# EAGLE board DUT-28bit-preCounter (EAGLE 5.07)
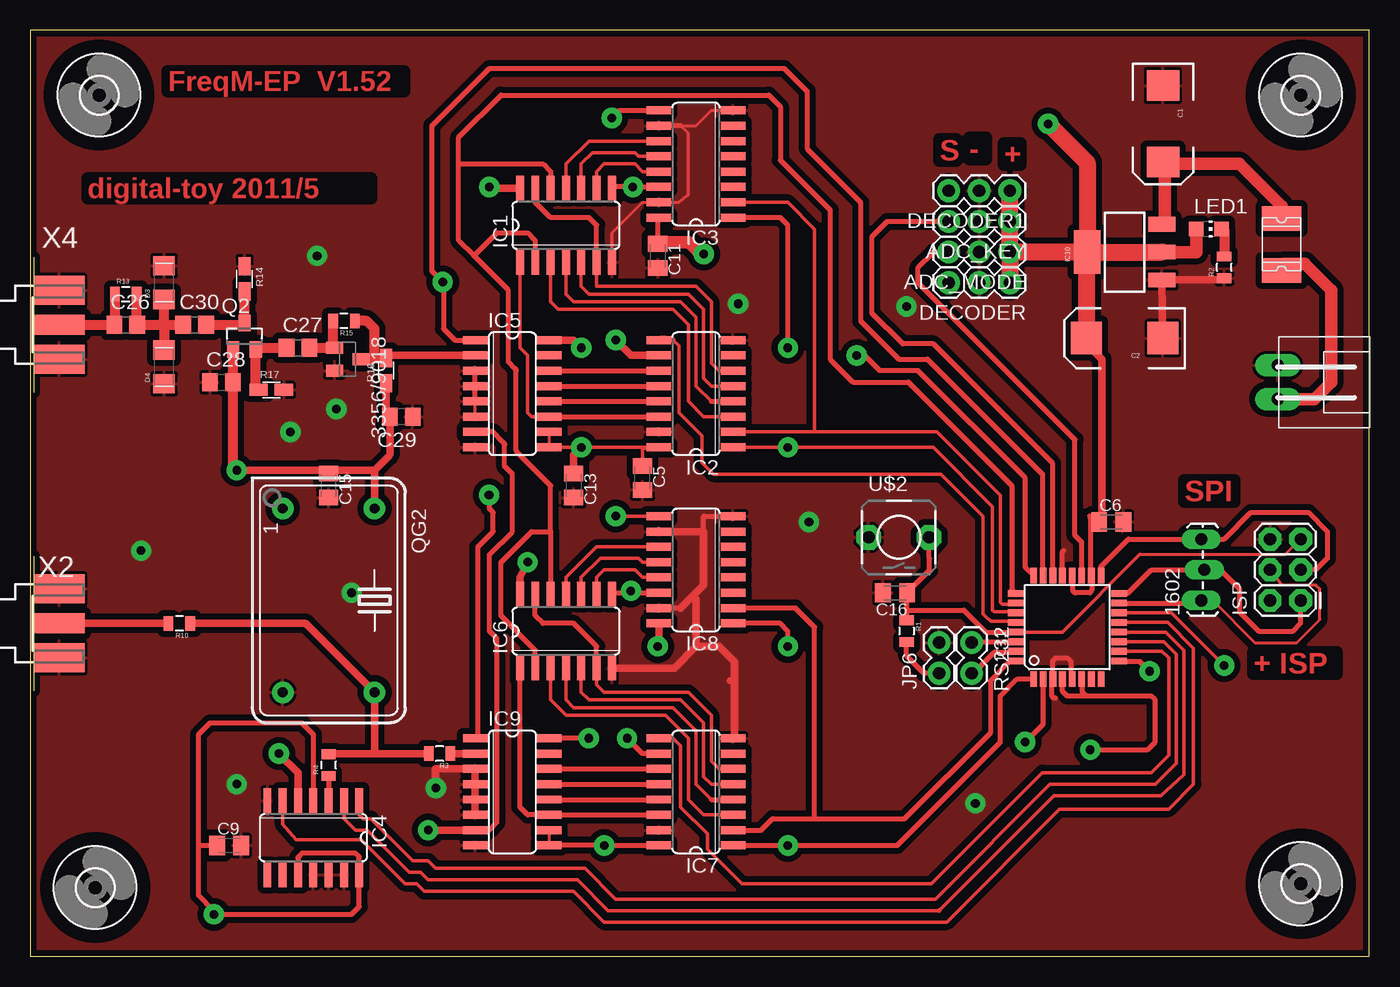
[diagram p0: board, top side]
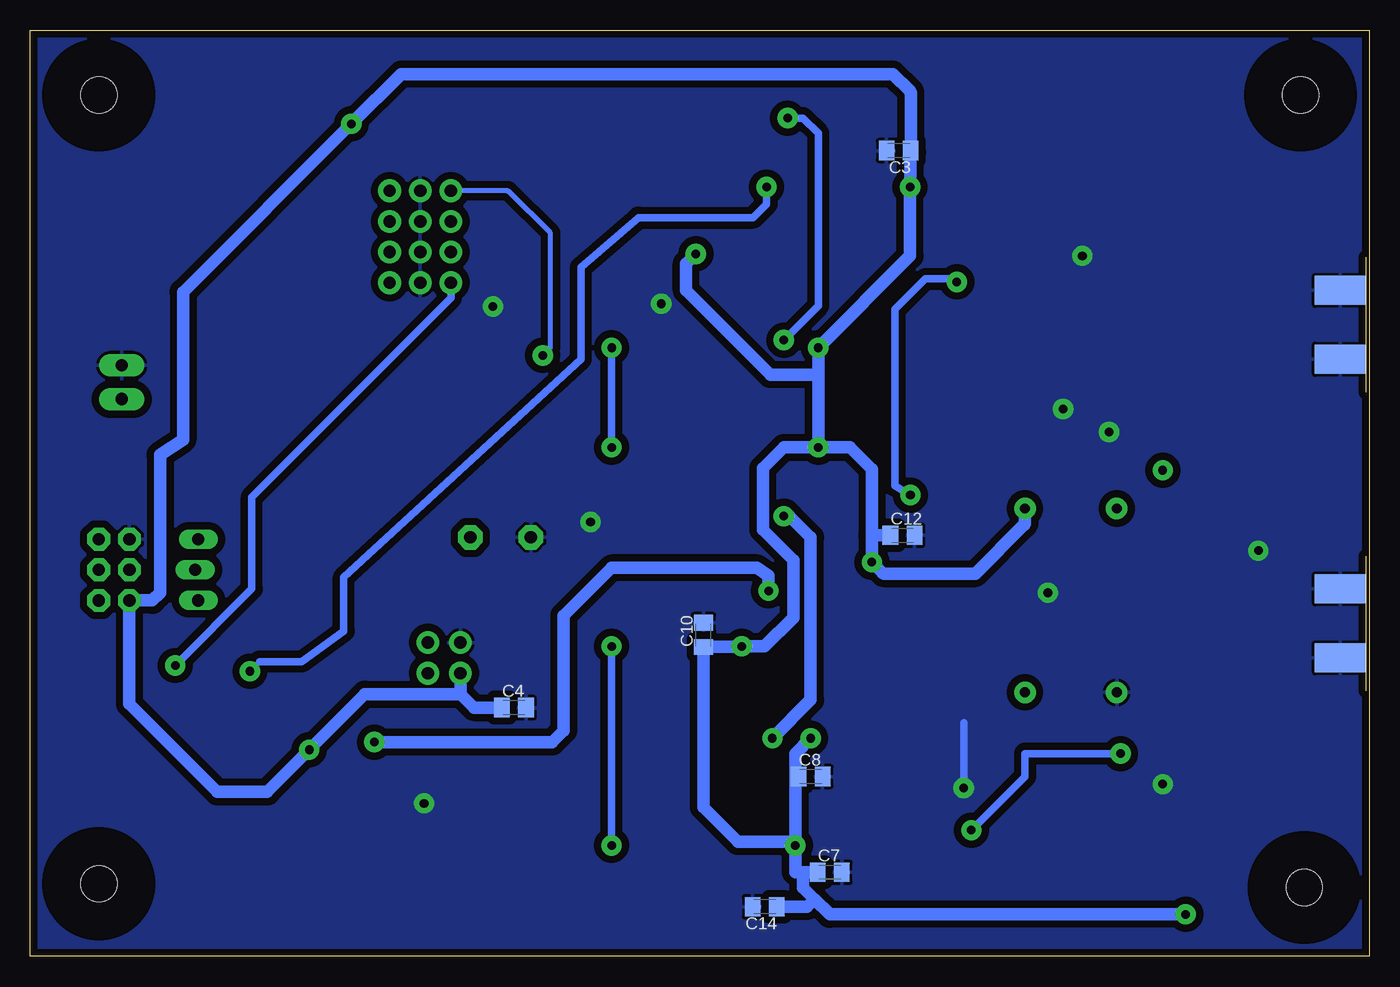
[diagram p1: board, bottom side, seen from below]

Size 111.11 x 76.82 mm. Coordinates in mm from the lower left corner, seen from the top.
Outline: 0,0 111.11,0 111.11,76.82 0,76.82 0,0
Copper layers (1*16): Top 0.035mm / dielectric 1.5mm / Bottom 0.035mm
Design rules "SparkFun": minimum track width 8mil, minimum drill 20mil, track to track 8mil, track to pad 8mil, pad to pad 8mil, via to via 8mil, smd to smd 8mil, copper to edge 10mil, drill to drill 8mil, minimum pad ring 12mil, minimum via ring 10mil, stop-mask expansion 4mil, vias tented up to drill 25mil, thermal gap 10mil

## Footprints (pad centres in the part's own frame; a part is rotated, then mirrored left to right if it is on the bottom)
1X03_LOCK_LONGPADS = drill 1.016 long: 1 0,0; 2 2.54,-0.254; 3 5.08,0
SOT23-BEC = smd 1 x 1.4: B -0.95,-1.1; C 0,1.1; E 0.95,-1.1
1X03 = drill 1.016 pad 1.88 round: 1 0,0; 2 2.54,0; 3 5.08,0
EIA7343 = smd 2.55 x 2.7: A 3.17,0; C -3.17,0
C0805K = smd 1.3 x 1.6: 1 -1,0; 2 1,0
C0805 = smd 1.3 x 1.5: 1 -0.95,0; 2 0.95,0
1206-DIODE = smd 1.6 x 1.8: A -1.4,0; K 1.4,0
3,0 = hole 3: 0,0
SO14 = smd 0.66 x 2.032: 1 -3.81,-3.073; 2 -2.54,-3.073; 3 -1.27,-3.073; 4 0,-3.073; 5 1.27,-3.073; 6 2.54,-3.073; 7 3.81,-3.073; 8 3.81,3.073; 9 2.54,3.073; 10 1.27,3.073; 11 0,3.073; 12 -1.27,3.073; 13 -2.54,3.073; 14 -3.81,3.073
SO16 = smd 0.66 x 2.032: 1 -4.445,-3.073; 2 -3.175,-3.073; 3 -1.905,-3.073; 4 -0.635,-3.073; 5 0.635,-3.073; 6 1.905,-3.073; 7 3.175,-3.073; 8 4.445,-3.073; 9 4.445,3.073; 10 3.175,3.073; 11 1.905,3.073; 12 0.635,3.073; 13 -0.635,3.073; 14 -1.905,3.073; 15 -3.175,3.073; 16 -4.445,3.073
SOT223 = smd 1.219 x 2.235: 1 -2.311,-3.099; 2 0,-3.099; 3 2.311,-3.099 | smd 3.6 x 2.2: 4 0,3.099
TQFP32-08 = smd 1.27 x 0.559: 1 -4.293,2.8; 2 -4.293,2; 3 -4.293,1.2; 4 -4.293,0.4; 5 -4.293,-0.4; 6 -4.293,-1.2; 7 -4.293,-2; 8 -4.293,-2.8; 17 4.293,-2.8; 18 4.293,-2; 19 4.293,-1.2; 20 4.293,-0.4; 21 4.293,0.4; 22 4.293,1.2; 23 4.293,2; 24 4.293,2.8 | smd 0.559 x 1.27: 9 -2.8,-4.293; 10 -2,-4.293; 11 -1.2,-4.293; 12 -0.4,-4.293; 13 0.4,-4.293; 14 1.2,-4.293; 15 2,-4.293; 16 2.8,-4.293; 25 2.8,4.293; 26 2,4.293; 27 1.2,4.293; 28 0.4,4.293; 29 -0.4,4.293; 30 -1.2,4.293; 31 -2,4.293; 32 -2.8,4.293
2X3 = drill 1.016 pad 1.88 octagon: 1 0,0; 2 0,2.54; 3 2.54,0; 4 2.54,2.54; 5 5.08,0; 6 5.08,2.54
1X02 = drill 1.016 pad 1.88 round: 1 0,0; 2 2.54,0
XH-1X2-LONG-LOCK = drill 1.016 pad 1.88 long: 1 1.397,0; 2 -1.397,0
CHIP-LED0805 = smd 1.2 x 1.2: A 0,-1.05; C 0,1.05
1812L = smd 2.03 x 3.3: P$1 -2.16,0; P$2 2.16,0
SOT23 = smd 1 x 1.4: 1 -0.95,-1.1; 2 0.95,-1.1; 3 0,1.1
DIL14S = drill 0.813 pad 1.778 round: 1 -7.62,-3.81; 7 7.62,-3.81; 8 7.62,3.81; 14 -7.62,3.81
0805 = smd 0.8 x 1.2: 1 -0.9,0; 2 0.9,0
R0805W = smd 1.5 x 1: 1 -1.052,0; 2 1.052,0
ALPS-SKHV = drill 1.016 pad 2.032 octagon: 2 -2.51,0; 3 2.51,0
SMA-KE = smd 4.191 x 1.651: 1 2.115,0 | smd 4.191 x 2.413: G@1 2.115,2.86; G@2 2.115,-2.86 | smd 4.191 x 2.413 bottom: G@3 2.115,2.86; G@4 2.115,-2.86

## Placement (x,y rotation side)
1602  [1X03_LOCK_LONGPADS]  97.16,29.53 90 top
3356/9018  [SOT23-BEC]  26.35,49.53 270 top
ADC_KEY  [1X03]  81.28,60.96 180 top
ADC_MODE  [1X03]  81.28,58.42 180 top
C1  10uf  [EIA7343]  93.98,69.06 270 top
C2  10uf  [EIA7343]  90.81,51.28 180 top
C3  104  [C0805K]  39.05,66.83 180 bottom
C4  104  [C0805K]  70.96,20.64 0 bottom
C5  104  [C0805K]  50.8,39.69 270 top
C6  104  [C0805K]  89.69,36.04 0 top
C7  104  [C0805K]  44.77,6.99 0 bottom
C8  104  [C0805K]  46.35,14.92 0 bottom
C9  [C0805K]  16.51,9.21 0 top
C10  [C0805K]  55.24,26.67 90 bottom
C11  104  [C0805K]  52.07,58.1 270 top
C12  104  [C0805K]  38.73,34.92 0 bottom
C13  104  [C0805K]  45.09,39.05 270 top
C14  104  [C0805K]  50.16,4.13 180 bottom
C15  104  [C0805K]  24.77,39.05 270 top
C16  100n  [C0805K]  71.75,30.16 180 top
C26  331  [C0805]  7.94,52.39 0 top
C27  103  [C0805]  22.23,50.48 0 top
C28  103  [C0805]  15.88,47.62 0 top
C29  103  [C0805]  30.8,44.77 180 top
C30  103  [C0805]  13.65,52.39 0 top
D3  4148  [1206-DIODE]  11.11,55.88 90 top
D4  4148  [1206-DIODE]  11.11,48.9 90 top
DECODER  [1X03]  81.28,55.88 180 top
DECODER1  [1X03]  81.28,63.5 180 top
H1  MOUNT-HOLE3.0  [3,0]  5.71,71.44 0 top
H2  MOUNT-HOLE3.0  [3,0]  105.41,6.03 0 top
H3  MOUNT-HOLE3.0  [3,0]  105.41,71.44 0 top
H4  MOUNT-HOLE3.0  [3,0]  5.4,5.71 0 top
IC1  74HC393D  [SO14]  44.45,60.64 0 top
IC2  74HC165D  [SO16]  55.24,46.67 90 top
IC3  74HC165D  [SO16]  55.24,65.72 90 top
IC4  74HC74D  [SO14]  23.5,9.84 180 top
IC5  4161D  [SO16]  40.01,46.67 270 top
IC6  74HC393D  [SO14]  44.45,26.99 0 top
IC7  74HC165D  [SO16]  55.24,13.65 90 top
IC8  74HC165D  [SO16]  55.24,32.07 90 top
IC9  4161D  [SO16]  40.01,13.65 270 top
IC10  1117-5V  [SOT223]  90.81,58.42 90 top
IC11  MEGA8-AI  [TQFP32-08]  86.04,27.3 90 top
ISP  AVR_SPI_PRG_6PTH  [2X3]  105.41,29.53 90 top
JP6  [1X02]  75.41,23.5 90 top
JP7  EXT  [XH-1X2-LONG-LOCK]  103.5,47.62 270 top
LED1  RED  [CHIP-LED0805]  97.79,60.33 270 top
PTC  500mA  [1812L]  103.82,59.05 90 top
Q2  SST5485  [SOT23]  17.78,51.44 0 top
QG2  1M/50M  [DIL14S]  24.77,29.53 270 top
R1  10k  [0805]  72.71,26.99 270 top
R2  400R  [0805]  99.06,57.15 90 top
R3  33  [0805]  33.97,16.83 180 top
R4  33  [0805]  24.77,15.88 90 top
R10  33  [0805]  12.38,27.62 180 top
R13  100R  [0805]  7.94,54.93 0 top
R14  1M  [R0805W]  17.78,56.2 270 top
R15  9.1k  [0805]  26.04,52.7 180 top
R16  560R  [R0805W]  29.53,48.58 90 top
R17  1k  [R0805W]  20,46.99 0 top
RS232  [1X02]  78.11,26.04 270 top
U$2  TACT_SWITCH-2-PTH  [ALPS-SKHV]  72.07,34.77 0 top
X2  SMA--KE  [SMA-KE]  0.32,27.62 0 top
X4  SMA--KE  [SMA-KE]  0.32,52.39 0 top

## Library data of the parts
1602 ADC_KEY ADC_MODE DECODER DECODER1 IC10 ISP = SparkFun
3356/9018 C1-C16 C26-C30 D3 D4 JP6 JP7 PTC QG2 R1-R4 R10 R13-R17 RS232 U$2 = digital-toy
H1-H4 = holes
IC1-IC4 IC6-IC8 = 74xx-eu
IC5 IC9 = 40xx
IC11 = atmel
LED1 = led
Q2 = transistor-fet
X2 X4 = dtoy-RF

## Nets
ADC_KEY: ADC_KEY.3 IC11.22
ADC_MODE: ADC_MODE.3 IC11.19
BUTTON: DECODER1.3 IC11.24
CLK-165: IC7.2 IC8.2 IC11.32
CLK-165-DUT: IC2.2 IC3.2 IC11.26
CLK-REF: QG2.8 R3.2 R4.2 R10.1
CLR-161: IC5.1 IC9.1 IC11.23
CLR-393: IC1.2 IC1.12 IC6.2 IC6.12 IC11.25
CLR-FF: IC4.1 IC11.11
D-FF: IC4.2 IC11.12
DECODER: DECODER.3 IC11.14
GATE-161: IC4.5 IC5.7 IC9.7
GND: 3356/9018.E ADC_KEY.2 ADC_MODE.2 C1.C C2.C C3.2 C4.2 C5.2 C6.2 C7.2 C8.2 C9.2 C10.2 C11.2 C12.2 C13.2 C14.2 C15.2 C16.2 C28.1 C29.1 D3.K D4.A DECODER1.2 DECODER.2 IC1.7 IC2.8 IC2.15 IC3.8 IC3.10 IC3.15 IC4.7 IC4.11 IC4.12 IC4.13 IC5.3 IC5.4 IC5.5 IC5.6 IC5.8 IC6.7 IC7.8 IC7.15 IC8.8 IC8.10 IC8.15 IC9.3 IC9.4 IC9.5 IC9.6 IC9.8 IC10.1 IC11.3 IC11.5 IC11.21 ISP.6 JP6.2 JP7.2 QG2.7 R2.1 R14.1 R17.2 U$2.2 X2.G@1 X2.G@2 X2.G@3 X2.G@4 X4.G@1 X4.G@2 X4.G@3 X4.G@4
MISO: 1602.2 IC11.16 ISP.1
MOSI: 1602.1 IC11.15 ISP.4
N$1: IC2.11 IC5.14
N$2: IC2.12 IC5.13
N$3: IC2.13 IC5.12
N$4: JP7.1 PTC.P$1
N$5: IC1.3 IC2.3
N$6: IC1.4 IC2.4
N$7: IC1.5 IC2.5
N$8: IC1.6 IC1.13 IC2.6
N$9: IC1.1 IC2.14 IC5.11
N$10: IC1.11 IC3.11
N$11: IC1.10 IC3.12
N$12: IC1.9 IC3.13
N$13: IC11.30 RS232.1
N$14: C1.A IC10.3 PTC.P$2
N$15: IC2.10 IC3.9
N$16: IC7.11 IC9.14
N$17: IC7.12 IC9.13
N$18: IC7.13 IC9.12
N$19: R10.2 X2.1
N$20: IC6.3 IC7.3
N$21: IC6.4 IC7.4
N$22: IC6.5 IC7.5
N$23: IC6.6 IC6.13 IC7.6
N$24: IC6.11 IC8.11
N$25: IC6.10 IC8.12
N$26: IC6.9 IC8.13
N$27: IC11.31 RS232.2
N$28: IC6.1 IC7.14 IC9.11
N$29: IC4.3 R4.1
N$30: IC7.10 IC8.9
N$31: IC9.2 R3.1
N$32: LED1.C R2.2
N$41: C26.1 R13.1 X4.1
N$42: C26.2 C30.1 D3.A D4.K R13.2
N$43: C27.1 Q2.2 R17.1
N$44: 3356/9018.B C27.2 R15.2
N$45: 3356/9018.C IC5.2 R15.1 R16.2
N$46: C30.2 Q2.3 R14.2
NQ-FF: IC4.6 IC11.13
PD4/T0: IC6.8 IC8.14 IC11.2
PD5/T1: IC1.8 IC3.14 IC11.9
QH-165: IC7.9 IC11.10
QH-165-DUT: IC2.9 IC11.28
RESET: C16.1 IC11.29 ISP.5 R1.1 U$2.3
SCK: 1602.3 IC11.17 ISP.3
SHLD-165: IC7.1 IC8.1 IC11.1
SHLD-165-DUT: IC2.1 IC3.1 IC11.27
VCC: ADC_KEY.1 ADC_MODE.1 C2.A C3.1 C4.1 C5.1 C6.1 C7.1 C8.1 C9.1 C10.1 C11.1 C12.1 C13.1 C14.1 C15.1 C28.2 C29.2 DECODER1.1 DECODER.1 IC1.14 IC2.16 IC3.16 IC4.4 IC4.10 IC4.14 IC5.9 IC5.10 IC5.16 IC6.14 IC7.16 IC8.16 IC9.9 IC9.10 IC9.16 IC10.2 IC10.4 IC11.4 IC11.6 IC11.18 IC11.20 ISP.2 JP6.1 LED1.A Q2.1 QG2.14 R1.2 R16.1

## Tracks (layer width: path | path; a pad name or v marks a point on that pad's centre or on a via)
ADC_KEY
  Top 0.406: IC11.22 84.84,40.89 74.93,50.8 72.39,50.8 69.85,53.34 69.85,59.69 71.12,60.96 ADC_KEY.3
ADC_MODE
  Top 0.406: IC11.19 87.24,34.36 86.68,34.92 86.68,42.86 73.66,55.88 73.66,57.15 74.93,58.42 ADC_MODE.3
BUTTON  (via drill 0.71 pad 1.68)
  Top 0.406: IC11.24 82.62,32.22 arc-45 82.55,32.4 82.55,39.69 73.66,48.58 70.48,48.58 69.29,49.77 arc45 69.11,49.85 v68.58,49.85
  Bottom 0.406: DECODER1.3 71.54,63.5 arc45 71.36,63.43 67.94,60.01 67.94,50.59 arc45 68.02,50.41 v68.58,49.85
CLK-165
  Top 0.406: IC8.2 63.5,28.89 65.09,27.3 65.09,11.43 | IC7.2 60.64,10.48 61.59,11.43 65.09,11.43 | IC11.32 81.34,24.5 79.69,22.86 79.69,18.57 72.55,11.43 65.09,11.43
CLK-165-DUT
  Top 0.254: 81.66,29.21 IC11.26
  Top 0.305: IC3.2 62.87,62.55 65.09,60.33 65.09,43.5 | 81.66,29.21 80.64,29.21 80.49,29.37 80.49,38.26 | IC2.2 65.09,43.5 | 80.49,38.26 | 80.49,38.26 75.25,43.5 65.09,43.5
CLK-REF
  Top 0.61: 28.57,16.83 24.89,16.83 arc45 R4.2 | 28.57,16.83 R3.2 | 28.57,16.83 QG2.8 22.93,27.55 arc45 22.75,27.62 R10.1
CLR-161  (via drill 0.71 pad 1.68)
  Top 0.254: IC9.1 36.93,18.2 | 38.1,38.24 v38.08,38.27
  Top 0.406: 36.93,18.2 37.15,18.1 37.15,33.97 38.42,35.24 38.42,36.83 38.1,37.15 38.1,38.24 | IC5.1 35.24,51.12 34.29,52.07 34.29,55.69 v34.23,55.94 33.34,56.83 33.34,68.9 38.1,73.66 62.55,73.66 64.45,71.75 64.45,66.99 68.9,62.55 68.9,52.7 72.07,49.53 74.45,49.53 83.98,40.01 83.98,31.66 IC11.23
  Bottom 0.406: 34.92,56.2 34.8,56.2
  Bottom 0.61: 34.92,56.2 36.83,56.2 39.37,53.66 39.37,39.05 v38.08,38.27 | 34.8,56.2 v34.23,55.94
CLR-393
  Top 0.406: 43.18,35.24 IC6.12 | 43.18,35.24 43.18,39.05 40.4,41.84 arc-45 40.32,42.02 40.32,48.58 arc45 40.25,48.76 39.69,49.32 39.69,55.24 36.83,58.1 | IC6.2 41.91,25.4 39.05,28.26 39.05,32.7 41.59,35.24 43.18,35.24 | 36.83,58.1 35.56,59.37 35.56,65.72 | 35.56,65.72 35.56,67.94 39.05,71.44 61.28,71.44 62.23,70.48 62.23,66.04 66.36,61.91 66.36,49.53 68.26,47.62 72.87,47.62 81.44,39.05 81.44,30.42 IC11.25 | IC1.12 43.18,65.09 42.55,65.72 35.56,65.72 | IC1.2 41.91,59.37 41.27,60.01 38.73,60.01 36.83,58.1
CLR-FF
  Top 0.305: IC11.11 94.07,26.11 95.09,25.08 95.09,16.03 93.34,14.29 84.61,14.29 75.09,4.76 48.58,4.76 46.04,7.3 33.66,7.3 33.02,7.94 31.75,7.94 28.26,11.43 27.62,11.43 27.3,11.75 IC4.1
D-FF
  Top 0.305: IC11.12 94.22,26.91 95.73,25.4 95.73,15.08 93.82,13.34 84.93,13.34 75.41,3.81 47.94,3.81 45.4,6.35 33.02,6.35 32.38,6.99 31.43,6.99 27.94,10.48 26.99,10.48 26.04,11.43 IC4.2
  Top 0.406: 75.41,3.81
DECODER  (via drill 0.71 pad 1.68)
  Top 0.305: IC11.14 94.69,28.5 v99.06,24.13
  Bottom 0.61: v99.06,24.13 92.71,30.48 92.71,38.1 76.2,54.61 DECODER.3
GATE-161  (via drill 0.71 pad 1.68)
  Top 0.406: IC9.7 38.1,10.48 38.73,11.11 38.73,26.35 38.1,26.99 38.1,33.34 40.01,35.24 40.01,40.01 39.37,40.64 39.37,42.44 arc45 39.3,42.62 38.42,43.5 IC5.7
  Top 0.61: v33.02,10.48 IC9.7 | IC4.5 22.23,15.24 v20.64,16.83
  Bottom 0.61: v33.02,10.48 28.57,14.92 28.57,16.83 v20.64,16.83
GND  (via drill 0.71 pad 1.68)
  Top 0.254: IC5.6 IC5.5 | IC1.7 48.26,60.01 50.8,62.55 IC3.15 53.82,62.55 54.61,63.18 54.61,68.26 53.98,68.9 | 93.9,55.98 IC10.1 | IC3.10 55.24,68.9 56.52,70.17 IC3.8
  Top 0.406: IC5.5 IC5.4 IC5.3 | 55.88,35.24 55.88,36.51 IC8.8 | 53.98,28.89 IC8.15 | 53.98,68.9 IC3.10 | 85.09,21.43 84.93,21.43 84.77,21.59 84.77,22.94 IC11.3 84.84,24.52 85.09,24.77 86.04,24.77 86.36,24.45 86.36,23.09 IC11.5 | IC11.21 85.64,33.57 85.72,33.66
  Top 0.61: IC8.10 55.88,35.24 55.88,30.8 54.93,29.84 | IC6.7 53.44,23.91 55.24,25.72 | IC7.8 58.42,18.1 58.42,22.86 | 58.42,22.86 58.42,24.45 57.15,25.72 55.24,25.72 | IC9.6 IC9.5 IC9.4 IC9.3 33.66,15.56 v33.66,13.97 | C2.C 93.9,55.98 | IC10.1 99.06,56.11 R2.1 | 58.42,22.86 58.1,22.86 | 54.93,29.84 53.98,28.89 | 55.24,25.72 55.24,29.53 arc90 54.93,29.84
  Bottom 0.61: v33.66,13.97 33.66,19.37
  other vias: 58.74,54.13 64.61,36.04 78.42,12.7 25.4,45.4 72.71,53.91 17.14,14.29 9.21,33.66 21.59,43.5 23.81,58.1 26.67,30.16
  pour Top (isolate 0.508): -3.17,83.5 114.3,80.33 118.9,78.42 127.79,15.88 116.2,-7.94 16.51,-7.94 -16.83,-4.76 -16.83,67.63
  pour Bottom (isolate 0.61): -1.27,82.23 113.67,84.14 147.32,58.1 144.46,-7.46 114.94,-4.13 26.04,-3.49 -10.79,-2.86 -10.79,72.71
MISO
  Top 0.406: IC11.16 91.06,30.11 93.03,32.07 1602.2 98.74,32.07 100.33,30.48 100.33,28.57 101.92,26.99 104.78,26.99 105.41,27.62 ISP.1
MOSI
  Top 0.254: 1602.1 98.11,29.53 101.6,26.04 105.09,26.04 107,27.94 107,30.48 106.68,30.8 103.82,30.8 ISP.4
  Top 0.406: IC11.15 96.93,29.3 1602.1
N$1
  Top 0.406: IC5.14 IC2.11
N$2
  Top 0.406: IC5.13 IC2.12
N$3
  Top 0.406: IC5.12 IC2.13
N$4
  Top 0.406: 104.01,57.47 PTC.P$1
  Top 1.016: JP7.1 106.55,46.23 107.95,47.62 107.95,55.24 105.73,57.47 104.01,57.47
N$5
  Top 0.305: IC2.3 55.88,44.77 54.61,46.04 54.61,52.39 53.34,53.66 43.81,53.66 43.18,54.29 IC1.3
N$6
  Top 0.305: IC1.4 44.45,54.93 45.09,54.29 53.98,54.29 55.24,53.02 55.24,47.31 56.52,46.04
  Top 0.406: 56.52,46.04 IC2.4
N$7
  Top 0.305: IC2.5 56.52,47.31 55.88,47.94 55.88,53.66 54.61,54.93 46.35,54.93 45.72,55.56 IC1.5
N$8
  Top 0.305: IC1.6 46.99,55.56 55.24,55.56 56.52,54.29 56.52,49.21 57.15,48.58 IC2.6
  Top 0.406: IC1.13 41.91,62.55 43.18,61.28 46.35,61.28 46.99,60.64 IC1.6
N$9
  Top 0.305: IC1.1 40.64,50.48 41.27,49.85 41.27,45.09 41.59,44.77 IC5.11
  Top 0.406: IC5.11 IC2.14
N$10
  Top 0.305: IC1.11 44.45,65.72 46.35,67.63 IC3.11
N$11
  Top 0.305: IC1.10 45.72,65.72 46.67,66.67 50.16,66.67 50.48,66.36 IC3.12
N$12
  Top 0.305: IC1.9 46.99,65.09 47.62,65.72 50.16,65.72 50.8,65.09 IC3.13
N$13
  Top 0.406: IC11.30 78.17,26.11 RS232.1
N$14
  Top 0.406: 94.14,65.72 C1.A | IC10.3 94.14,60.97
  Top 1.016: PTC.P$2 103.82,62.23 100.33,65.72 94.14,65.72 94.14,60.97
N$15  (via drill 0.71 pad 1.68)
  Top 0.406: IC3.9 48.9,70.17 v48.26,69.53
  Top 0.61: IC2.10 49.85,49.85 v48.58,51.12
  Bottom 0.61: v48.26,69.53 46.99,69.53 45.72,68.26 45.72,53.98 v48.58,51.12
N$16
  Top 0.406: IC9.14 IC7.11
N$17
  Top 0.406: IC9.13 IC7.12
N$18
  Top 0.406: IC9.12 IC7.13
N$19
  Top 0.61: X2.1 R10.2
N$20
  Top 0.305: IC6.3 43.18,21.27 44.45,20 52.7,20 54.61,18.1 54.61,13.02 55.88,11.75 IC7.3
N$21
  Top 0.305: 56.52,13.02 55.24,14.29 55.24,18.73 53.34,20.64 45.09,20.64 44.45,21.27 IC6.4
  Top 0.406: 56.52,13.02 IC7.4
N$22
  Top 0.305: IC6.5 45.72,21.91 46.35,21.27 53.98,21.27 55.88,19.37 55.88,14.92 56.52,14.29 IC7.5
N$23
  Top 0.305: IC6.6 46.99,22.54 47.62,21.91 54.61,21.91 56.52,20 56.52,16.19 57.15,15.56 IC7.6
  Top 0.406: IC6.13 41.91,28.26 42.55,27.62 45.09,27.62 46.99,25.72 IC6.6
N$24
  Top 0.305: IC6.11 44.45,31.43 46.99,33.97 IC8.11
N$25
  Top 0.305: IC6.10 45.72,31.43 47.31,33.02 50.48,33.02 50.8,32.7 IC8.12
N$26
  Top 0.305: IC6.9 46.99,31.43 47.62,32.07 50.16,32.07 50.8,31.43 IC8.13
N$27
  Top 0.406: RS232.2 78.26,23.5 80.01,25.24 81.69,25.24 IC11.31
N$28
  Top 0.406: IC7.14 IC9.11 41.27,11.75 40.64,12.38 IC6.1
N$29
  Top 0.406: R4.1 IC4.3
N$30  (via drill 0.71 pad 1.68)
  Top 0.305: v48.58,36.51 IC8.9
  Top 0.406: IC7.10 50.8,16.83 v49.53,18.1
  Bottom 1.016: v49.53,18.1 46.35,21.27 46.35,34.77 48.1,36.51 v48.58,36.51
N$31
  Top 0.61: R3.1 IC9.2
N$32
  Top 0.254: LED1.C 99.06,60.33
  Top 0.813: 99.06,60.33 R2.2
N$41
  Top 0.813: X4.1 C26.1 arc45 7.04,52.51 R13.1
N$42
  Top 0.813: C26.2 9.42,52.39 | C26.2 10.79,52.39 | 10.79,52.39 11.11,52.39 | 11.11,52.39 C30.1 | 11.11,52.39 D4.K | D3.A 11.11,52.81 arc-45 11.04,52.63 10.79,52.39 | R13.2 8.84,52.51 arc45 C26.2
N$43
  Top 0.813: R17.1 18.8,47.14 arc-45 18.73,47.31 Q2.2 18.8,50.41 arc-45 18.98,50.48 C27.1
N$44
  Top 0.813: C27.2 arc45 C27.2 3356/9018.B 25.21,50.52 arc-45 25.14,50.7 R15.2
N$45
  Top 0.305: 29.85,49.85 arc45 29.67,49.77 R16.2
  Top 0.61: 29.85,49.85 IC5.2
  Top 0.813: 3356/9018.C 27.48,49.56 arc-45 27.66,49.63 28.57,49.63 | 28.57,49.63 R16.2 | R15.1 27.84,52.7 arc-45 28.01,52.63 28.57,52.07 28.57,49.63
N$46
  Top 0.813: C30.2 17.53,52.39 arc45 17.71,52.46 Q2.3 R14.2
NQ-FF
  Top 0.305: IC4.6 20.95,10.95 22.07,9.68 27.46,9.68 31.11,6.03 32.07,6.03 32.7,5.4 45.09,5.4 47.62,2.86 76.04,2.86 85.41,12.22 94.46,12.22 96.52,14.29 96.52,25.56 94.37,27.7 IC11.13
PD4/T0  (via drill 0.71 pad 1.68)
  Top 0.254: IC6.8 48.36,30.16
  Top 0.406: 48.36,30.16 50.01,30.16 | 50.01,30.16 IC8.14 | 50.01,30.16 v49.85,30.32 | v82.55,17.78 84.04,19.27 IC11.2
  Bottom 1.016: v49.85,30.32 49.85,31.59 50.8,32.23 62.87,32.23 66.83,28.26 66.83,18.73 67.79,17.78 v82.55,17.78
PD5/T1  (via drill 0.71 pad 1.68)
  Top 0.254: 48.36,63.82 IC1.8
  Top 0.406: IC3.14 v50.01,63.82 48.36,63.82 | IC11.9 90.39,24.45 92.08,24.45 92.39,24.13 v92.87,23.65
  Bottom 0.406: 92.08,24.45 92.39,24.13
  Bottom 0.61: v50.01,63.82 50.01,62.39 51.12,61.28 60.64,61.28 65.41,57.15 65.41,49.53 85.09,31.43 85.09,26.99 88.58,24.45 92.08,24.45 | 92.39,24.13 v92.87,23.65
QH-165
  Top 0.305: IC7.9 53.34,18.1 53.98,17.46 53.98,12.38 56.2,10.16 56.2,8.89 59.05,6.03 74.77,6.03 83.98,15.24 93.03,15.24 94.46,16.67 94.46,24.77 93.89,25.3 IC11.10
QH-165-DUT
  Top 0.254: 81.67,27.78 IC11.28 | 79.3,28.18 79.22,28.26
  Top 0.305: 81.67,27.78 79.69,27.78 79.3,28.18 79.06,28.42 79.06,36.51 75.56,40.01 56.67,40.01 55.72,40.96 55.72,43.18 53.82,45.09 53.82,50.64 53.34,51.12
  Top 0.406: 53.34,51.12 52.86,51.12 52.7,51.28 52.33,51.28 IC2.9
RESET
  Top 0.254: 92.08,33.34 104.14,33.34 ISP.5
  Top 0.305: IC11.29 85.64,26.91 92.08,33.34
  Top 0.406: R1.1 72.75,27.93 72.75,28.73 | 72.75,28.73 C16.1 74.61,32.02 74.61,33.02 74.58,33.05 U$2.3 | IC11.29 79.3,26.91 77.47,28.73 72.75,28.73
SCK
  Top 0.406: IC11.17 88.84,32.33 91.12,34.61 1602.3 99.06,34.61 101.28,36.83 106.05,36.83 107.63,35.24 107.63,33.02 106.68,32.07 ISP.3
SHLD-165  (via drill 0.71 pad 1.68)
  Top 0.406: IC7.1 v62.87,9.21 71.94,9.21 80.49,17.75 80.49,21.59 81.91,23.01 IC11.1 | IC8.1 62.23,27.62 62.87,26.99 v62.87,25.72
  Bottom 0.61: v62.87,9.21 v62.87,25.72
SHLD-165-DUT  (via drill 0.71 pad 1.68)
  Top 0.254: 81.68,28.57 IC11.27
  Top 0.305: IC2.1 v62.87,42.23 63.98,42.23 65.88,42.23 | 81.68,28.57 80.01,28.57 79.85,28.73 79.85,37.31 74.93,42.23 65.88,42.23 | 65.88,42.23
  Top 0.406: IC3.1 62.23,61.28 62.87,60.64 v62.87,50.48
  Bottom 0.61: v62.87,42.23 v62.87,50.48
VCC  (via drill 0.71 pad 1.68)
  Top 0.254: IC5.9 IC5.10 | IC9.9 IC9.10 | v38.1,63.82 38.2,63.72
  Top 0.305: IC5.9 v45.72,42.23 IC2.16 50.8,42.13 C5.1 | v15.24,3.49 15.24,3.81 | 52.07,9.21 IC7.16 | 29.53,45.19 arc45 29.6,45.01 C29.2 | 25.14,40.32 arc45 24.96,40.25 C15.1 | 29.77,41.52 arc45 29.85,41.7
  Top 0.406: IC9.9 v47.62,9.21 52.07,9.21 | v46.35,18.1 IC9.16 | IC3.16 52.07,61.18 C11.1 52.18,59.21 | v55.88,58.26 55.56,58.26 | 87.31,23.08 IC11.6 87.31,22.94 87.31,21.91 87.63,21.59 | IC11.20 86.52,31.67 86.52,30.32 86.68,30.16 87.95,30.16 88.08,30.35 88.08,31.38 IC11.18 87.95,31.69 87.95,36.35 C6.1 | JP6.1 74.14,23.5 72.71,24.92 R1.2 | IC10.4 87.64,58.35 | C6.1 87.9,36.51 | IC11.4 85.64,21.99 86.04,21.59 87.63,21.59 | v84.45,69.06 84.21,68.81 | C6.1 88.9,35.83 88.9,35.56 | IC4.4 23.5,18.41 22.54,19.37 14.92,19.37 13.97,18.41 13.97,9.21 | 13.97,9.21 13.97,5.08 15.24,3.81 | 13.97,9.21 C9.1 | 52.17,26.45 52.17,25.82 v52.07,25.72 | v15.24,3.49 26.67,3.49 27.3,4.13 IC4.14 27.3,8.26 27.06,8.5 arc45 26.88,8.57 22.54,8.57 22.3,8.33 arc45 22.23,8.15 IC4.10 | v87.95,17.14 92.71,17.14 93.34,17.78 93.34,21.27 93.03,21.59 87.63,21.59 | C2.A
  Top 0.61: 38.2,63.72 IC1.14 | IC5.16 45.09,51.12 v45.72,50.48 | IC6.14 40.64,31.43 v41.27,32.7 | 52.17,26.45 IC8.16 | C13.1 45.09,41.59 v45.72,42.23 | 88.9,35.56 88.9,49.53 87.63,50.8 C2.A | 16.9,40.57 arc-45 16.82,40.75 | 29.73,47.62 arc45 29.55,47.55 R16.1 29.53,45.19 | QG2.14 28.57,40.32 | 28.57,40.32 25.14,40.32 | 29.85,41.7 C29.2 | 28.57,40.32 29.77,41.52 | v17.14,40.32 24.39,40.32 arc-45 24.57,40.25 C15.1
  Top 0.813: Q2.1 16.83,48.27 arc-45 C28.2 16.82,40.75 | v17.14,40.32 16.9,40.57
  Top 1.016: IC10.2 96.74,58.42 LED1.A | 55.56,58.26 54.61,59.21 52.18,59.21
  Top 1.422: IC10.2 IC10.4 87.71,65.81 v84.45,69.06 | C2.A 87.64,58.35 87.56,58.42 ADC_MODE.1 | ADC_MODE.1 ADC_KEY.1 DECODER1.1 | ADC_MODE.1 DECODER.1
  Bottom 0.406: 47.62,14.92 C8.1 | 47.78,28.1 47.78,28.26 | 52.12,25.67 v52.07,25.72
  Bottom 0.61: v45.72,42.23 46.35,42.23
  Bottom 1.016: v45.72,42.23 45.72,48.26 | 45.72,48.26 v45.72,50.48 38.1,58.1 v38.1,63.82 C3.1 | v46.35,18.1 47.62,16.83 47.62,14.92 v47.62,9.21 | v55.88,58.26 56.67,57.47 56.67,55.24 49.69,48.26 45.72,48.26 | 47.78,28.26 47.78,32.86 50.32,35.4 50.32,40.48 48.58,42.23 v45.72,42.23 | C3.1 37.89,66.67 | 41.27,34.92 41.27,40.42 IC5.9 v45.72,42.23 | 41.27,34.92 v41.27,32.7 40.4,31.82 arc-45 40.22,31.75 32.7,31.75 28.65,35.8 arc-45 28.57,35.98 QG2.14 | 41.27,34.92 C12.1 | v15.24,3.49 44.77,3.49 46.04,4.76 | v47.62,9.21 47.62,6.99 47.31,6.99 | 46.04,4.76 46.99,5.71 46.99,6.67 47.31,6.99 | 47.31,6.99 C7.1 | 47.78,28.1 50.16,25.72 v52.07,25.72 | 52.12,25.67 C10.1 55.24,12.38 52.39,9.53 47.94,9.53 v47.62,9.21 | C14.1 46.67,4.13 46.04,4.76 | 75.41,21.75 JP6.1 | 75.41,21.75 74.3,20.64 C4.1 | 75.41,21.75 83.34,21.75 v87.95,17.14 91.44,13.65 95.57,13.65 102.87,20.95 ISP.2 100.97,29.53 100.33,30.16 100.33,41.59 98.42,42.86 98.42,55.09 v84.45,69.06 80.33,73.18 39.53,73.18 38.13,71.78 arc45 38.05,71.6 C3.1

## Text on the board
Top: FreqM-EP V1.52 | S | - | + | digital-toy 2011/5 | SPI | + ISP